# EAGLE board Backplane4 (EAGLE 6.4)

Size 149.86 x 299.42 mm. Coordinates in mm from the lower left corner, seen from the top.
Outline: 0,149.71 149.86,299.42 149.86,0 0,149.71
Copper layers (1*16): Top 0.035mm / dielectric 1.5mm / Bottom 0.035mm
Design rules "default": minimum track width 10mil, minimum drill 24mil, track to track 8mil, track to pad 8mil, pad to pad 8mil, via to via 8mil, smd to smd 8mil, copper to edge 40mil, drill to drill 8mil, minimum pad ring 10mil, minimum via ring 8mil, stop-mask expansion 4mil, vias tented up to drill 0mil, thermal gap 10mil

## Footprints (pad centres in the part's own frame; a part is rotated, then mirrored left to right if it is on the bottom)
50PIN-IDC = drill 0.9 pad 1.27: 1 -22.73,-1; 2 -22.73,1; 3 -20.73,-1; 4 -20.73,1; 5 -18.73,-1; 6 -18.73,1; 7 -16.73,-1; 8 -16.73,1; 9 -14.73,-1; 10 -14.73,1; 11 -12.73,-1; 12 -12.73,1; 13 -10.73,-1; 14 -10.73,1; 15 -8.73,-1; 16 -8.73,1; 17 -6.73,-1; 18 -6.73,1; 19 -4.73,-1; 20 -4.73,1; 21 -2.73,-1; 22 -2.73,1; 23 -0.73,-1; 24 -0.73,1; 25 1.27,-1; 26 1.27,1; 27 3.27,-1; 28 3.27,1; 29 5.27,-1; 30 5.27,1; 31 7.27,-1; 32 7.27,1; 33 9.27,-1; 34 9.27,1; 35 11.27,-1; 36 11.27,1; 37 13.27,-1; 38 13.27,1; 39 15.27,-1; 40 15.27,1; 41 17.27,-1; 42 17.27,1; 43 19.27,-1; 44 19.27,1; 45 21.27,-1; 46 21.27,1; 47 23.27,-1; 48 23.27,1; 49 25.27,-1; 50 25.27,1
LED5MM = drill 0.813 octagon: A -1.27,0; K 1.27,0
5566-20 = drill 1.4 square: 1 18.9,-2.75; 2 14.7,-2.75; 3 10.5,-2.75; 4 6.3,-2.75; 5 2.1,-2.75; 6 -2.1,-2.75; 7 -6.3,-2.75; 8 -10.5,-2.75; 9 -14.7,-2.75; 10 -18.9,-2.75; 11 18.9,2.75; 12 14.7,2.75; 13 10.5,2.75; 14 6.3,2.75; 15 2.1,2.75; 16 -2.1,2.75; 17 -6.3,2.75; 18 -10.5,2.75; 19 -14.7,2.75; 20 -18.9,2.75 | hole 3: 23.6,2.29; -23.6,2.29
0204/7 = drill 0.813 octagon: 1 -3.81,0; 2 3.81,0
TACTILE-PTH = drill 1.016 pad 1.88: 1 -3.251,2.261; 2 3.251,2.261; 3 -3.251,-2.261; 4 3.251,-2.261
CONN_50PIN = drill 1.2 pad 1.778 square: A1 -30.446,-2.446; A2 -27.906,-2.446; A3 -25.366,-2.446; A4 -22.826,-2.446; A5 -20.286,-2.446; A6 -17.746,-2.446; A7 -15.206,-2.446; A8 -12.666,-2.446; A9 -10.126,-2.446; A10 -7.586,-2.446; A11 -5.046,-2.446; A12 -2.506,-2.446; A13 0,-2.446; A14 2.574,-2.446; A15 5.114,-2.446; A16 7.654,-2.446; A17 10.194,-2.446; A18 12.734,-2.446; A19 15.274,-2.446; A20 17.814,-2.446; A21 20.354,-2.446; A22 22.894,-2.446; A23 25.434,-2.446; A24 27.974,-2.446; A25 30.514,-2.446; B1 -30.446,-7.526; B2 -27.906,-7.526; B3 -25.366,-7.526; B4 -22.826,-7.526; B5 -20.286,-7.526; B6 -17.746,-7.526; B7 -15.206,-7.526; B8 -12.666,-7.526; B9 -10.126,-7.526; B10 -7.586,-7.526; B11 -5.046,-7.526; B12 -2.506,-7.526; B13 0.034,-7.526; B14 2.574,-7.526; B15 5.114,-7.526; B16 7.654,-7.526; B17 10.194,-7.526; B18 12.734,-7.526; B19 15.274,-7.526; B20 17.814,-7.526; B21 20.354,-7.526; B22 22.894,-7.526; B23 25.434,-7.526; B24 27.974,-7.526; B25 30.514,-7.526

## Placement (x,y rotation side)
EXPANSION  IDC_50PIN  [50PIN-IDC]  118.67,182.7 45 top
EXPANSION1  IDC_50PIN  [50PIN-IDC]  120.39,115.09 135 top
LED1  [LED5MM]  55.98,149.65 0 top
PWR_IN  5566-20  [5566-20]  87.71,149.67 90 top
R1  [0204/7]  65.94,139.68 0 top
S1  SWITCH-MOMENTARY-2PTH  [TACTILE-PTH]  65.85,159.85 0 top
U$1  CONN_50PIN  [CONN_50PIN]  92.82,206.61 45 top
U$2  CONN_50PIN  [CONN_50PIN]  92.82,92.81 135 top

## Library data of the parts
EXPANSION EXPANSION1 U$1 U$2 = ARVP
LED1 = led
PWR_IN = con-molex; OC_FARNELL: unknown; OC_NEWARK: unknown
R1 = resistor
S1 = SparkFun

## Nets
3.3V: PWR_IN.1 PWR_IN.2 PWR_IN.11
3V3: EXPANSION1.1 EXPANSION.1 U$1.A1 U$2.A1
5V: EXPANSION1.2 EXPANSION.2 PWR_IN.4 PWR_IN.6 PWR_IN.19 PWR_IN.20 U$1.B1 U$2.B1
12V: EXPANSION1.49 EXPANSION.49 PWR_IN.10 U$1.A25 U$2.A25
DEPTH_SIG: EXPANSION1.47 EXPANSION.47 U$1.A24 U$2.A24
DIR_X0: EXPANSION1.4 EXPANSION.4 U$1.B2 U$2.B2
DIR_X1: EXPANSION1.6 EXPANSION.6 U$1.B3 U$2.B3
DIR_Y0: EXPANSION1.8 EXPANSION.8 U$1.B4 U$2.B4
DIR_Y1: EXPANSION1.10 EXPANSION.10 U$1.B5 U$2.B5
DIR_Z0: EXPANSION1.12 EXPANSION.12 U$1.B6 U$2.B6
DIR_Z1: EXPANSION1.14 EXPANSION.14 U$1.B7 U$2.B7
ETPU6: EXPANSION1.15 EXPANSION.15 U$1.A8 U$2.A8
ETPU7: EXPANSION1.17 EXPANSION.17 U$1.A9 U$2.A9
ETPU8: EXPANSION1.19 EXPANSION.19 U$1.A10 U$2.A10
ETPU9: EXPANSION1.21 EXPANSION.21 U$1.A11 U$2.A11
GND: EXPANSION1.27 EXPANSION1.28 EXPANSION1.50 EXPANSION.27 EXPANSION.28 EXPANSION.50 LED1.K PWR_IN.3 PWR_IN.5 PWR_IN.7 PWR_IN.13 PWR_IN.15 PWR_IN.16 PWR_IN.17 S1.1 U$1.A14 U$1.B14 U$1.B25 U$2.A14 U$2.B14 U$2.B25
H_PHONE0: EXPANSION1.43 EXPANSION.43 U$1.A22 U$2.A22
H_PHONE1: EXPANSION1.44 EXPANSION.44 U$1.B22 U$2.B22
H_PHONE2: EXPANSION1.45 EXPANSION.45 U$1.A23 U$2.A23
H_PHONE3: EXPANSION1.46 EXPANSION.46 U$1.B23 U$2.B23
I2C_SCL: EXPANSION1.25 EXPANSION.25 U$1.A13 U$2.A13
I2C_SDA: EXPANSION1.23 EXPANSION.23 U$1.A12 U$2.A12
KILL_SIG: EXPANSION1.48 EXPANSION.48 U$1.B24 U$2.B24
MANI0: EXPANSION1.35 EXPANSION.35 U$1.A18 U$2.A18
MANI1: EXPANSION1.36 EXPANSION.36 U$1.B18 U$2.B18
MANI2: EXPANSION1.37 EXPANSION.37 U$1.A19 U$2.A19
MCP_CS: EXPANSION1.20 EXPANSION.20 U$1.B10 U$2.B10
MCP_STRB: EXPANSION1.22 EXPANSION.22 U$1.B11 U$2.B11
MCS_CS: EXPANSION1.24 EXPANSION.24 U$1.B12 U$2.B12
MCS_STRB: EXPANSION1.26 EXPANSION.26 U$1.B13 U$2.B13
N$1: LED1.A R1.1
N$10: PWR_IN.14 S1.3
N$11: PWR_IN.8 R1.2
PWM_X0: EXPANSION1.3 EXPANSION.3 U$1.A2 U$2.A2
PWM_X1: EXPANSION1.5 EXPANSION.5 U$1.A3 U$2.A3
PWM_Y0: EXPANSION1.7 EXPANSION.7 U$1.A4 U$2.A4
PWM_Y1: EXPANSION1.9 EXPANSION.9 U$1.A5 U$2.A5
PWM_Z0: EXPANSION1.11 EXPANSION.11 U$1.A6 U$2.A6
PWM_Z1: EXPANSION1.13 EXPANSION.13 U$1.A7 U$2.A7
SENSE0: EXPANSION1.38 EXPANSION.38 U$1.B19 U$2.B19
SPARE0: EXPANSION1.16 EXPANSION.16 U$1.B8 U$2.B8
SPARE1: EXPANSION1.18 EXPANSION.18 U$1.B9 U$2.B9
SPARE2: EXPANSION1.39 EXPANSION.39 U$1.A20 U$2.A20
SPARE3: EXPANSION1.40 EXPANSION.40 U$1.B20 U$2.B20
SPARE4: EXPANSION1.41 EXPANSION.41 U$1.A21 U$2.A21
SPARE5: EXPANSION1.42 EXPANSION.42 U$1.B21 U$2.B21
SPI_CLK: EXPANSION1.33 EXPANSION.33 U$1.A17 U$2.A17
SPI_CS1: EXPANSION1.30 EXPANSION.30 U$1.B15 U$2.B15
SPI_CS2: EXPANSION1.32 EXPANSION.32 U$1.B16 U$2.B16
SPI_CS3: EXPANSION1.34 EXPANSION.34 U$1.B17 U$2.B17
SPI_IN: EXPANSION1.29 EXPANSION.29 U$1.A15 U$2.A15
SPI_OUT: EXPANSION1.31 EXPANSION.31 U$1.A16 U$2.A16

## Tracks (layer width: path | path; a pad name or v marks a point on that pad's centre or on a via)
3.3V  (2 unrouted)
3V3  (3 unrouted)
5V  (7 unrouted)
12V  (4 unrouted)
DEPTH_SIG  (3 unrouted)
DIR_X0  (3 unrouted)
DIR_X1  (3 unrouted)
DIR_Y0  (3 unrouted)
DIR_Y1  (3 unrouted)
DIR_Z0  (3 unrouted)
DIR_Z1  (3 unrouted)
ETPU6  (3 unrouted)
ETPU7  (3 unrouted)
ETPU8  (3 unrouted)
ETPU9  (3 unrouted)
GND  (20 unrouted)
H_PHONE0  (3 unrouted)
H_PHONE1  (3 unrouted)
H_PHONE2  (3 unrouted)
H_PHONE3  (3 unrouted)
I2C_SCL  (3 unrouted)
I2C_SDA  (3 unrouted)
KILL_SIG  (3 unrouted)
MANI0  (3 unrouted)
MANI1  (3 unrouted)
MANI2  (3 unrouted)
MCP_CS  (3 unrouted)
MCP_STRB  (3 unrouted)
MCS_CS  (3 unrouted)
MCS_STRB  (3 unrouted)
N$1  (1 unrouted)
N$10  (1 unrouted)
N$11  (1 unrouted)
PWM_X0  (3 unrouted)
PWM_X1  (3 unrouted)
PWM_Y0  (3 unrouted)
PWM_Y1  (3 unrouted)
PWM_Z0  (3 unrouted)
PWM_Z1  (3 unrouted)
SENSE0  (3 unrouted)
SPARE0  (3 unrouted)
SPARE1  (3 unrouted)
SPARE2  (3 unrouted)
SPARE3  (3 unrouted)
SPARE4  (3 unrouted)
SPARE5  (3 unrouted)
SPI_CLK  (3 unrouted)
SPI_CS1  (3 unrouted)
SPI_CS2  (3 unrouted)
SPI_CS3  (3 unrouted)
SPI_IN  (3 unrouted)
SPI_OUT  (3 unrouted)

## Text on the board
Top: >=10mil Signal | 1.24 Power